# Altium PCB 175-00059, rev1, PCB, Extender for Short Crate PCB.PcbDoc
Units mm, origin at the board's own origin, x right, y up, seen from the top; angles counter-clockwise.
Board outline 55.6 x 100 mm, 4 copper layers (Top Layer (*GTL), InternalPlane1(*.GP1), InternalPlane2(*.GP2), Bottom Layer (GBL)); 5 components, 14 nets, 94 pads, 0 vias.
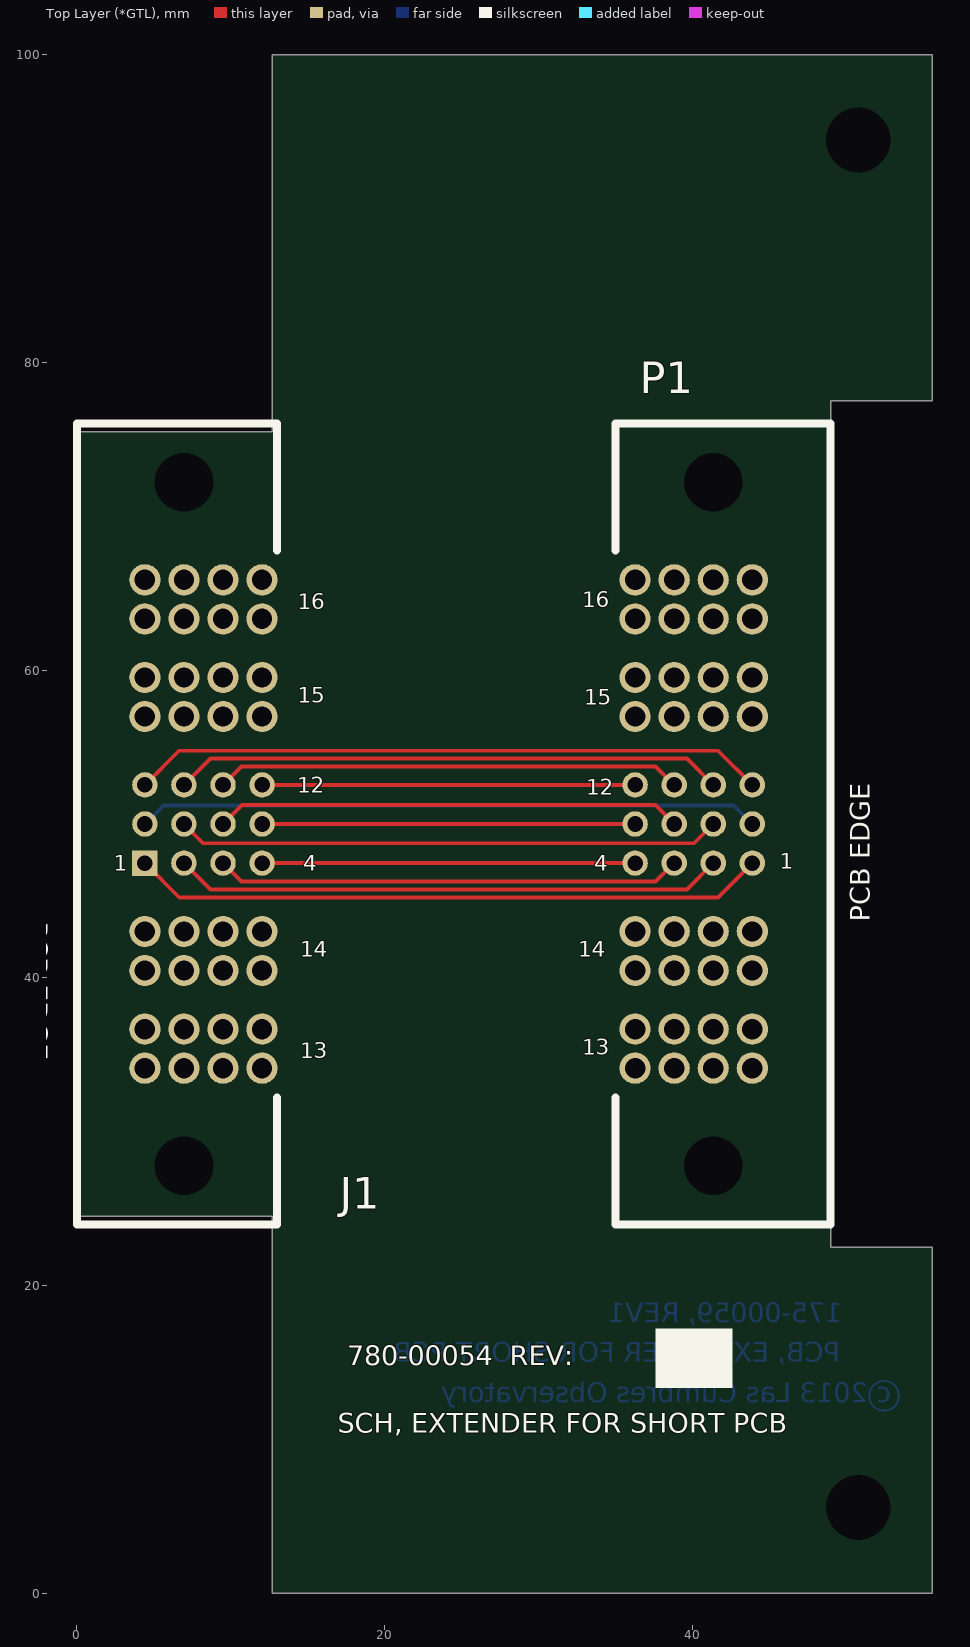
[diagram p0: Top Layer (*GTL) view]
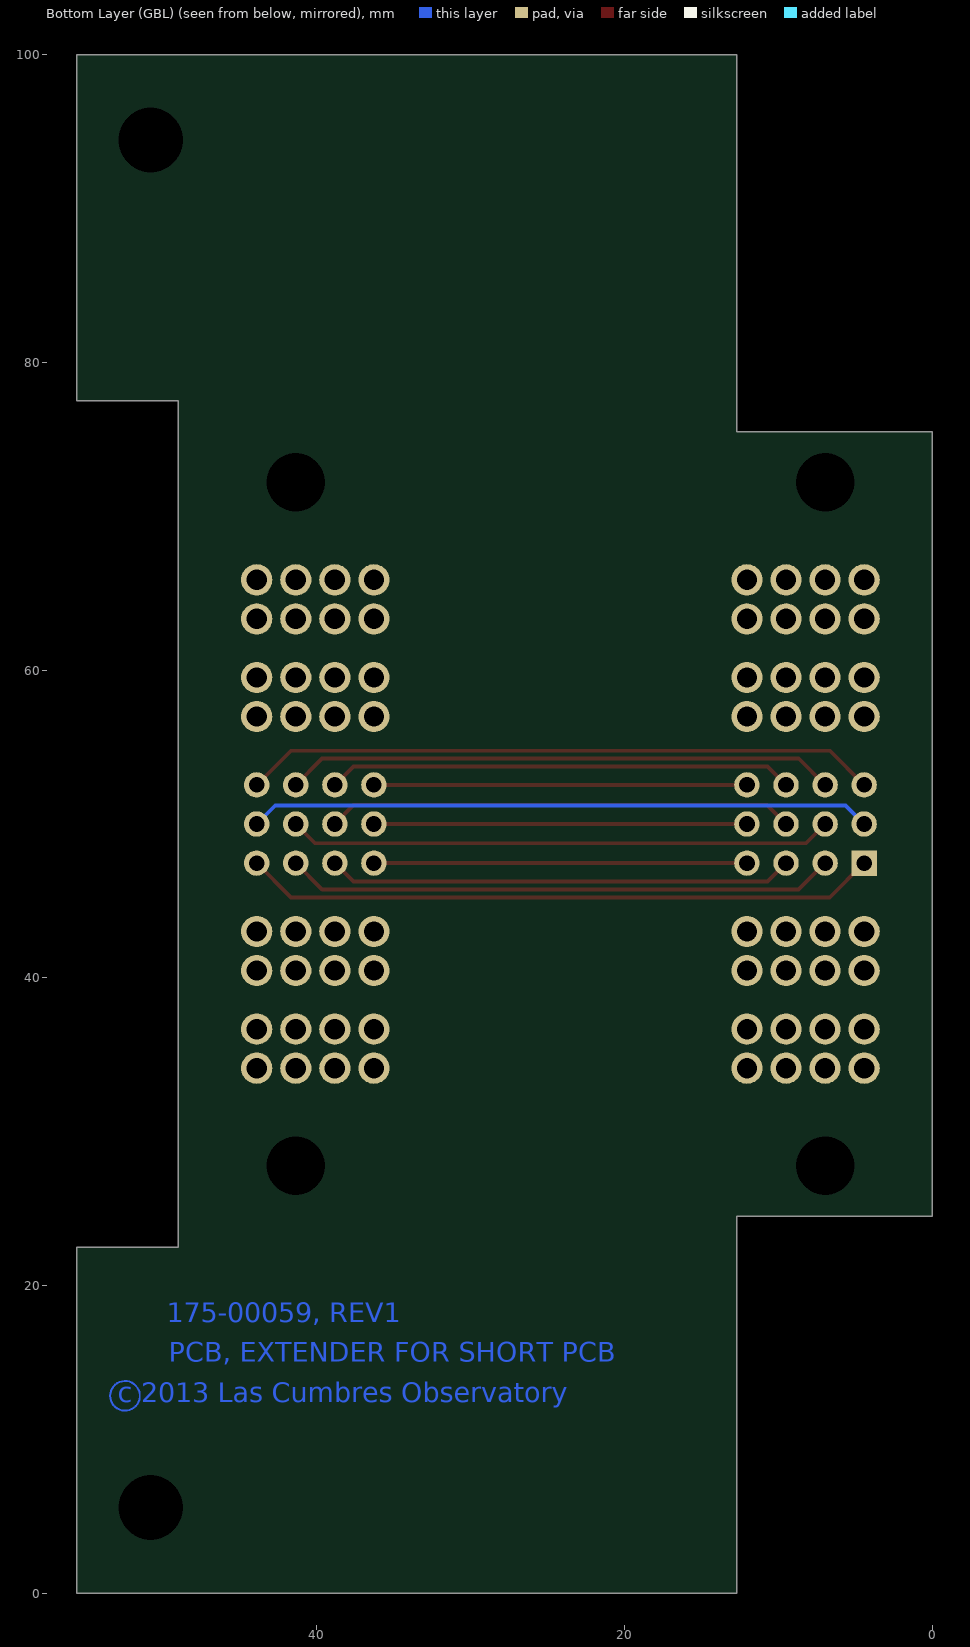
[diagram p1: Bottom Layer (GBL) view, seen from below]
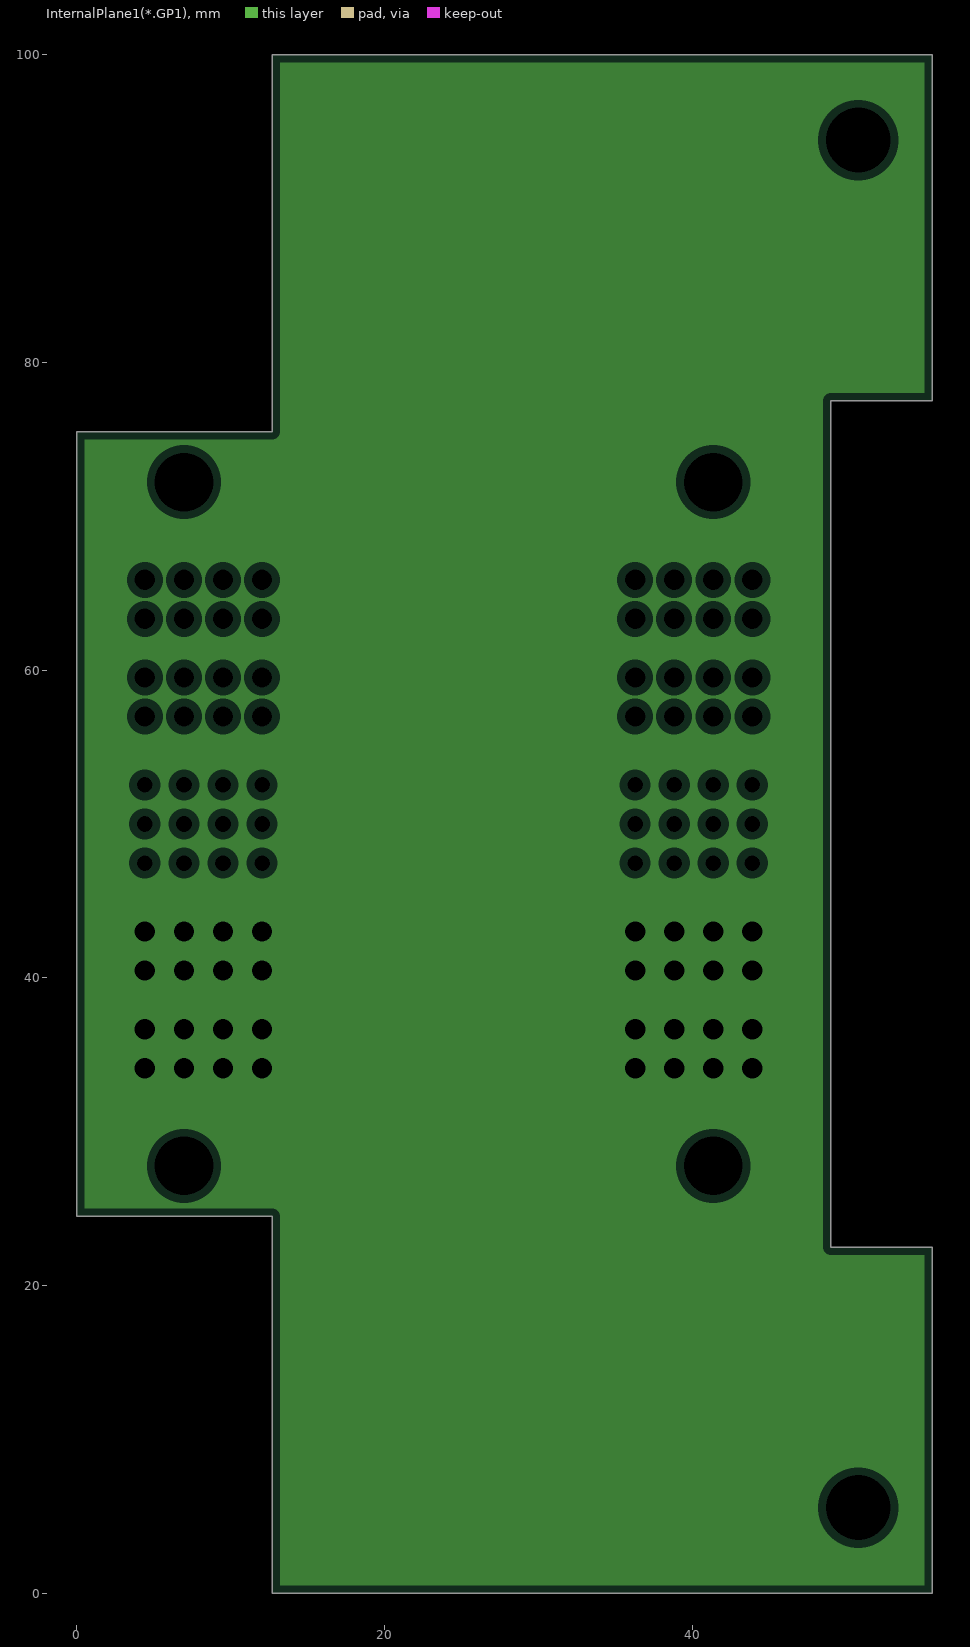
[diagram p2: InternalPlane1(*.GP1), clearances drawn from the general rule]
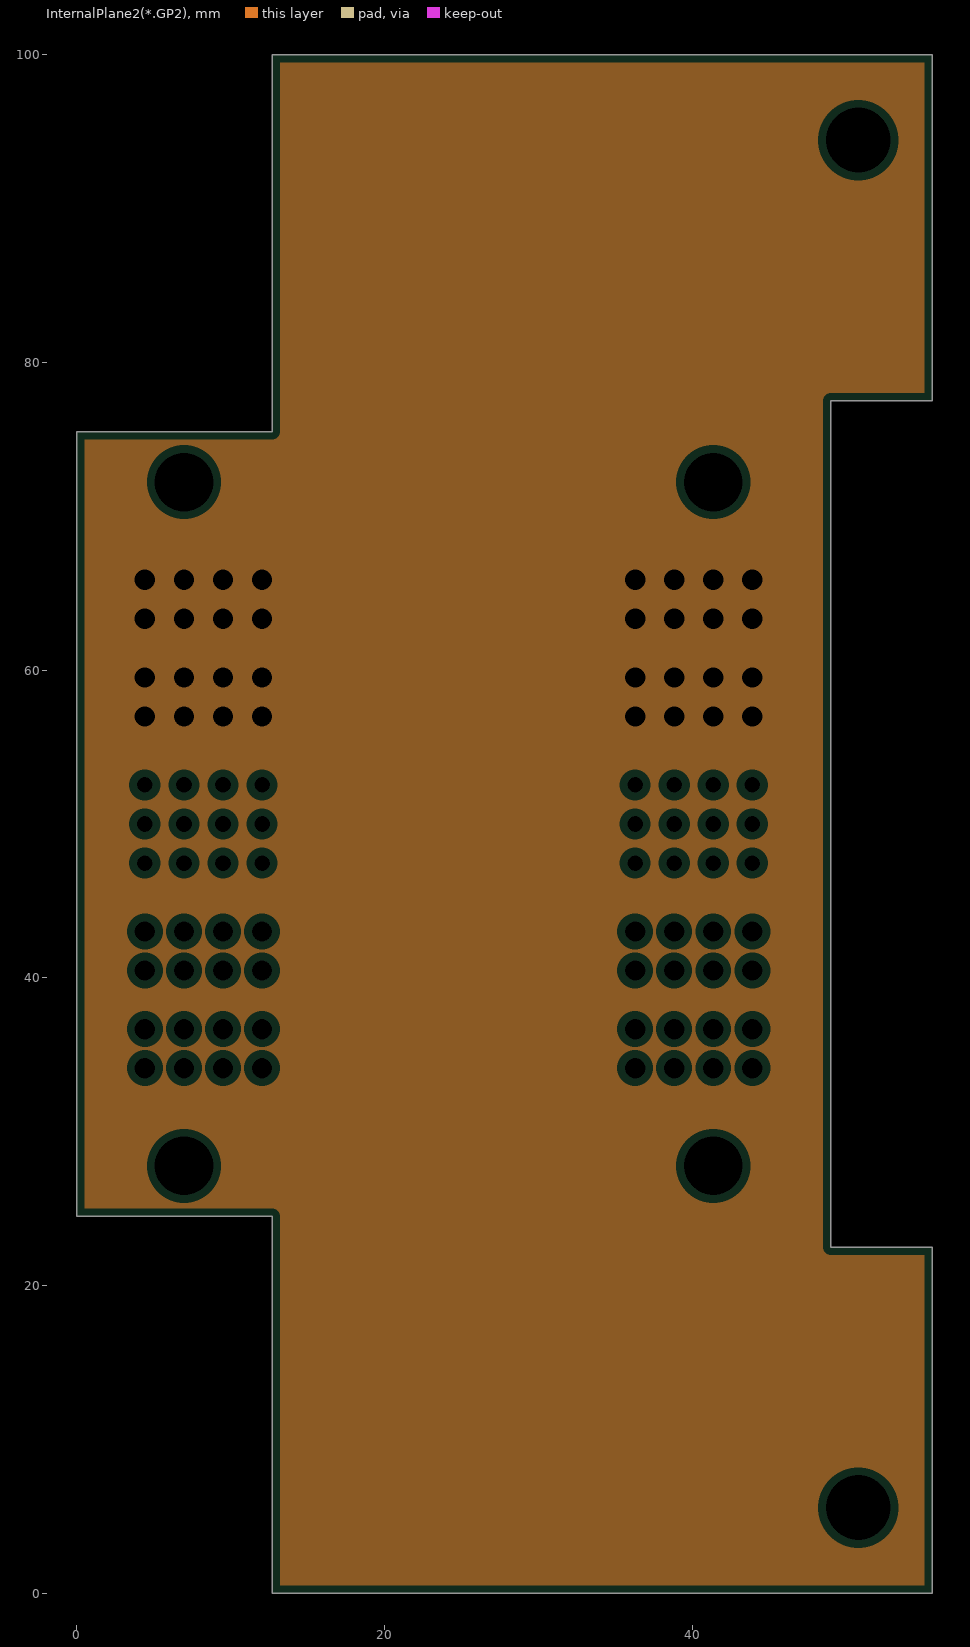
[diagram p3: InternalPlane2(*.GP2), clearances drawn from the general rule]

## Layer stack, top to bottom
Top Layer (*GTL): signal copper 0.0356
Dielectric: core 0.32, FR-4, Dk 4.8
InternalPlane1(*.GP1): plane copper 0.0356, net +24V
Dielectric: prepreg 0.32, FR-4, Dk 4.8
InternalPlane2(*.GP2): plane copper 0.0356, net GND
Dielectric: core 0.32, FR-4, Dk 4.8
Bottom Layer (GBL): signal copper 0.0356

## Board outline
0,24.5 12.7,24.5 12.7,0 55.6,0 55.6,22.5 49,22.5 49,77.5 55.6,77.5 55.6,100 12.7,100 12.7,75.5 0,75.5

## Design rules (kind name [scope] priority, off if disabled: settings)
Clearance [All] p1: gap=0.254
HoleSize [All] p1: absolutevalues=TRUE maxlimit=7.62 minlimit=0.025 maxpercent=80.000 minpercent=20.000
PlaneClearance [All] p1: clearance=0.508
PlaneConnect [All] p1: planeconnectstyle=Direct reliefexpansion=0.508 reliefentries=4 reliefconductorwidth=0.254 reliefairgap=0.254
PolygonConnect [All] p1: connectstyle=Relief reliefconductorwidth=0.254 reliefentries=4 polygonreliefangle="90 Angle"
RoomDefinition "780-00054, rev1, Pg1, SCH, Extender for Short Crate PCB" [InComponentClass('780-00054, rev1, Pg1, SCH, Extender for Short Crate PCB')] p1: confinementstyle=ConfineIn formatcopy=TRUE lockcomponents=FALSE outline -141.075,-15.1 99.125,-15.1 99.125,116.875 -141.075,116.875
RoutingVias [All] p1: holewidth=0.711 width=1.27 viastyle="Through Hole" minholewidth=0.711 minwidth=1.27 maxholewidth=0.711 maxwidth=1.27
SilkscreenOverComponentPads [All] p1: minsilkscreentomaskgap=0.254
SolderMaskExpansion [All] p1: expansion=0.102
Width [All] p1: maxlimit=2.54 minlimit=0.127 preferedwidth=0.254
24 further rules are at their usual default settings.

## Classes and differential pairs
component class "780-00054, rev1, Pg1, SCH, Extender for Short Crate PCB": J1 P1

## Components (designator, comment, footprint, x,y, rotation, side; value= is the part's Value field where it differs from the comment)
Designator89 "Comment" "TARGET MECHANICAL 5" -14.475,-35.7 r0 top
Designator90 "Comment" "TARGET MECHANICAL 5" -24.475,120 r0 top
Designator91 "Comment" "TARGET MECHANICAL 5" 64.425,120.85 r0 top
J1 "PESC-02-12-02--01-S-RA-SD" PESC-02-12-02-01-RA 8.23,50 r0 top
P1 "PETC-02-12-02--01-S-RA-SD" PETC-02-12-02-01-RA 40.1,50 r0 top

## Footprints (in the part's own frame and the unit in brackets; to place one, negate y for a bottom-side part, rotate by r counter-clockwise, add the part's x,y. Pads: shape width x height; smd on the part's side, far side on the other; paste and mask are expansions set on the pad)
PESC-02-12-02-01-RA [mil] "Samtec Female Sockets, PWR(4), Signal(12), Right Angle"
  round 59.06 hole 150 unplated: 0(-50,-875) 0(-50,875)
  rect 65x65 hole 40: 1(-150,-100)
  round 65 hole 40: 2(-50,-100) 3(50,-100) 4(150,-100) 5(-150,0) 6(-50,0) 7(50,0) 8(150,0) 9(-150,100) 10(-50,100) 11(50,100) 12(150,100)
  round 80 hole 52: 13(-150,-625) 13(-150,-525) 13(-50,-625) 13(-50,-525) 13(50,-625) 13(50,-525) 13(150,-625) 13(150,-525) 14(-150,-375) 14(-150,-275) 14(-50,-375) 14(-50,-275) 14(50,-375) 14(50,-275) 14(150,-375) 14(150,-275) 15(-150,275) 15(-150,375) 15(-50,275) 15(-50,375) 15(50,275) 15(50,375) 15(150,275) 15(150,375) 16(-150,525) 16(-150,625) 16(-50,525) 16(-50,625) 16(50,525) 16(50,625) 16(150,525) 16(150,625)
  silkscreen extent -324,-1025 188,1025
PETC-02-12-02-01-RA [mil] "Samtec Male Pins, PWR(4), Signal(12), Right Angle"
  round 59.06 hole 150 unplated: 0(50,-875) 0(50,875)
  round 65 hole 40: 1(150,-100) 2(50,-100) 3(-50,-100) 4(-150,-100) 5(150,0) 6(50,0) 7(-50,0) 8(-150,0) 9(150,100) 10(50,100) 11(-50,100) 12(-150,100)
  round 80 hole 52: 13(-150,-625) 13(-150,-525) 13(-50,-625) 13(-50,-525) 13(50,-625) 13(50,-525) 13(150,-625) 13(150,-525) 14(-150,-375) 14(-150,-275) 14(-50,-375) 14(-50,-275) 14(50,-375) 14(50,-275) 14(150,-375) 14(150,-275) 15(-150,275) 15(-150,375) 15(-50,275) 15(-50,375) 15(50,275) 15(50,375) 15(150,275) 15(150,375) 16(-150,525) 16(-150,625) 16(-50,525) 16(-50,625) 16(50,525) 16(50,625) 16(150,525) 16(150,625)
  silkscreen extent -200,-1025 350,1025
"TARGET MECHANICAL 5" [mm]

## Part data
J1: library part PETC-02-12-02--01-S-RA-SD, "SAMTEC, SIGNAL(12)+PWR(4)"
P1: "SAMTEC, SIGNAL(12)+PWR(4)"

## Free pads (board coordinates)
  round 4 hole 4.22 unplated: 2(50.795,5.563) 2(50.795,94.463)

## Nets (pads, with @x,y where several pads share a name; then routed paths per layer and width w, separated by ;. In a path a pad name is that pad's centre, name@x,y a point inside that pad or via, vN(x,y) a via of type N, cw(c..) or ccw(c..) an arc to the next point about the centre after c; other vN are vias at no path point)
+24V: J1.13 J1.14 P1.13 P1.14
GND: J1.15 J1.16 P1.15 P1.16
NetJ1_1: J1.1 P1.1 | length 41.3
  Top Layer (*GTL) w0.254: J1.1 6.655,45.225 41.675,45.225 P1.1
NetJ1_2: J1.2 P1.2 | length 35.8
  Top Layer (*GTL) w0.254: J1.2 8.678,45.742 39.652,45.742 P1.2
NetJ1_3: J1.3 P1.3 | length 30.3
  Top Layer (*GTL) w0.254: J1.3 10.71,46.25 37.62,46.25 P1.3
NetJ1_4: J1.4 P1.4 | length 24.2
  Top Layer (*GTL) w0.254: J1.4 P1.4
NetJ1_5: J1.5 P1.5 | length 40.5
  Bottom Layer (GBL) w0.254: J1.5 5.626,51.206 7.46,51.206 7.466,51.2 8.994,51.2 9,51.206 42.703,51.206 P1.5
NetJ1_6: J1.6 P1.6 | length 35.4
  Top Layer (*GTL) w0.254: J1.6 8.21,48.75 40.12,48.75 P1.6
NetJ1_7: J1.7 P1.7 | length 30.3
  Top Layer (*GTL) w0.254: J1.7 10.725,51.225 37.605,51.225 P1.7
NetJ1_8: J1.8 P1.8 | length 24.2
  Top Layer (*GTL) w0.254: J1.8 P1.8
NetJ1_9: J1.9 P1.9 | length 41.3
  Top Layer (*GTL) w0.254: J1.9 6.642,54.762 41.687,54.762 P1.9
NetJ1_10: J1.10 P1.10 | length 35.8
  Top Layer (*GTL) w0.254: J1.10 8.674,54.254 39.655,54.254 P1.10
NetJ1_11: J1.11 P1.11 | length 30.3
  Top Layer (*GTL) w0.254: J1.11 10.706,53.746 37.623,53.746 P1.11
NetJ1_12: J1.12 P1.12 | length 24.2
  Top Layer (*GTL) w0.254: J1.12 P1.12
pads on no net: J1.0 P1.0
copper on no net: | length 6.1
  Bottom Layer (GBL) w0.127: 53.44,12.825 ccw(c52.475,12.825) 53.44,12.825

## Polygon pours and split planes (outlines as drawn)
+24V on InternalPlane1(*.GP1) (split plane): 55.09,78.01 49,78.01 48.9,78.001 48.805,77.972 48.716,77.924 48.639,77.861 48.576,77.784 48.528,77.695 48.499,77.6 48.49,77.5 48.49,22.5 48.499,22.4 48.528,22.305 48.576,22.216 48.639,22.139 48.716,22.076 48.805,22.028 48.9,21.999 49,21.99 55.09,21.99 55.09,0.51 13.21,0.51 13.21,24.5 13.201,24.6 13.172,24.695 13.124,24.784 13.061,24.861 12.984,24.924 12.895,24.972 12.8,25.001 12.7,25.01 0.51,25.01 0.51,74.99 12.7,74.99 12.8,74.999 12.895,75.028 12.984,75.076 13.061,75.139 13.124,75.216 13.172,75.305 13.201,75.4 13.21,75.5 13.21,99.49 55.09,99.49
GND on InternalPlane2(*.GP2) (split plane): 55.09,78.01 49,78.01 48.9,78.001 48.805,77.972 48.716,77.924 48.639,77.861 48.576,77.784 48.528,77.695 48.499,77.6 48.49,77.5 48.49,22.5 48.499,22.4 48.528,22.305 48.576,22.216 48.639,22.139 48.716,22.076 48.805,22.028 48.9,21.999 49,21.99 55.09,21.99 55.09,0.51 13.21,0.51 13.21,24.5 13.201,24.6 13.172,24.695 13.124,24.784 13.061,24.861 12.984,24.924 12.895,24.972 12.8,25.001 12.7,25.01 0.51,25.01 0.51,74.99 12.7,74.99 12.8,74.999 12.895,75.028 12.984,75.076 13.061,75.139 13.124,75.216 13.172,75.305 13.201,75.4 13.21,75.5 13.21,99.49 55.09,99.49

## Other copper
Top Layer (*GTL):
  text "*.GTL - TOP LAYER GERBER DATA" at -7.032,-27.325 h2.03
Bottom Layer (GBL):
  text "175-00059, REV1" at 49.75,17.625 h1.27
  text "PCB, EXTENDER FOR SHORT PCB" at 49.625,15.025 h1.27
  text "c 2013 Las Cumbres Observatory" at 52.95,12.4 h1.27
  text "*.GBL - BOTTOM LAYER GERBER DATA" at -7.032,-27.325 h2.03
InternalPlane1(*.GP1) (plane layer: these items are gaps in the copper):
  text "*.GP1 - INTERNAL PLANE LAYER 1 GERBER DATA" at -7.032,-27.325 h2.03
InternalPlane2(*.GP2) (plane layer: these items are gaps in the copper):
  text "*.GP2 - INTERNAL PLANE LAYER 2 GERBER DATA" at -7.032,-27.325 h2.03

## Silkscreen, mask and mechanical layers (free items; w line width, h text height)
Top Overlay:
  rectangle: 37.6,13.35 42.625,17.2
  text "780-00054  REV:" at 17.575,14.8 h1.27
  text "SCH, EXTENDER FOR SHORT PCB" at 16.95,10.425 h1.27
  text "*.GTO - TOP OVERLAY GERBER DATA" at -7.032,-27.325 h2.03
Top Solder:
  text "*.GTS - TOP SOLDER MASK GERBER DATA" at -7.032,-27.325 h2.03
Bottom Solder:
  rectangle: 13.775,11.3 53.575,19.875
  text "*.GBS - BOTTOM SOLDER MASK GERBER DATA" at -7.032,-27.325 h2.03
Mechanical 1:
  the board outline again, w1
Mechanical 2:
  lines w0.127: -0.425,0 10.925,0 ; 0,-0.325 0,22.825
  lines w0.254: -390.507,-183.007 -390.507,223.393 142.893,223.393 142.893,-183.007 -390.507,-183.007 ; 39.896,-180.315 ccw(c41.166,-180.315) 41.166,-181.585 49.548,-181.585 ccw(c49.548,-180.569) 50.564,-180.569 50.564,-176.251 ccw(c49.548,-176.251) 49.548,-175.235 39.896,-175.235 39.896,-180.315 ; 39.896,-172.949 ccw(c41.166,-172.949) 41.166,-174.219 140.226,-174.219 ccw(c140.226,-172.949) 141.496,-172.949 141.496,-168.123 ccw(c140.226,-168.123) 140.226,-166.853 39.896,-166.853 39.896,-172.949 ; 39.896,-164.567 ccw(c41.166,-164.567) 41.166,-165.837 88.918,-165.837 ccw(c88.918,-164.567) 90.188,-164.567 90.188,-160.757 ccw(c88.918,-160.757) 88.918,-159.487 39.896,-159.487 39.896,-164.567 ; 39.896,-157.455 ccw(c40.912,-157.455) 40.912,-158.471 61.486,-158.471 ccw(c61.486,-157.201) 62.756,-157.201 62.756,-153.391 ccw(c61.486,-153.391) 61.486,-152.121 39.896,-152.121 39.896,-157.455 ; 51.58,-180.569 ccw(c52.596,-180.569) 52.596,-181.585 102.38,-181.585 ccw(c102.38,-180.569) 103.396,-180.569 103.396,-176.251 ccw(c102.38,-176.251) 102.38,-175.235 51.58,-175.235 51.58,-180.569 ; 63.772,-157.201 ccw(c65.042,-157.201) 65.042,-158.471 88.918,-158.471 ccw(c88.918,-157.201) 90.188,-157.201 90.188,-153.391 ccw(c88.918,-153.391) 88.918,-152.121 63.772,-152.121 63.772,-157.201 ; 91.204,-164.567 ccw(c92.474,-164.567) 92.474,-165.837 140.226,-165.837 ccw(c140.226,-164.567) 141.496,-164.567 141.496,-160.757 ccw(c140.226,-160.757) 140.226,-159.487 91.204,-159.487 91.204,-164.567 ; 91.204,-157.201 ccw(c92.474,-157.201) 92.474,-158.471 116.35,-158.471 ccw(c116.35,-157.201) 117.62,-157.201 117.62,-153.391 ccw(c116.35,-153.391) 116.35,-152.121 91.204,-152.121 91.204,-157.201 ; 104.412,-180.315 ccw(c105.682,-180.315) 105.682,-181.585 114.064,-181.585 ccw(c114.064,-180.569) 115.08,-180.569 115.08,-176.251 ccw(c114.064,-176.251) 114.064,-175.235 104.412,-175.235 104.412,-180.315 ; 116.096,-180.569 ccw(c117.112,-180.569) 117.112,-181.585 140.226,-181.585 ccw(c140.226,-180.315) 141.496,-180.315 141.496,-176.505 ccw(c140.226,-176.505) 140.226,-175.235 116.096,-175.235 116.096,-180.569 ; 118.636,-157.201 ccw(c119.906,-157.201) 119.906,-158.471 140.226,-158.471 ccw(c140.226,-157.201) 141.496,-157.201 141.496,-153.391 ccw(c140.226,-153.391) 140.226,-152.121 118.636,-152.121 118.636,-157.201
  lines w0.356: -358.576,-84.364 -226.374,-84.364 ; -358.576,-77.656 -226.374,-77.656 ; -360.1,-138.316 ccw(c-357.941,-138.316) -357.941,-140.475 -227.009,-140.475 ccw(c-227.009,-138.316) -224.85,-138.316 -224.85,-58.734 ccw(c-227.009,-58.734) -227.009,-56.575 -357.941,-56.575 ccw(c-357.941,-58.734) -360.1,-58.734 -360.1,-138.316
  lines w0.508: -389.997,-166.602 cw(c-388.729,-168.504) -388.729,-166.218 ; -388.729,-167.234 ccw(c-388.729,-168.504) -389.999,-168.504 -389.999,-180.95 ccw(c-388.729,-180.95) -388.729,-182.22 -307.449,-182.22 ccw(c-307.449,-180.95) -306.179,-180.95 -306.179,-172.314 ccw(c-307.449,-172.314) -307.449,-171.044 -374.505,-171.044 ; -305.547,-182.218 ccw(c-307.449,-180.95) -305.163,-180.95 -305.163,-172.314 ; 38.783,-182.6 cw(c41.166,-180.315) 37.864,-180.315 37.864,-137.897 cw(c41.166,-137.897) 41.166,-134.595 140.226,-134.595 cw(c140.226,-137.897) 142.478,-135.482 ; -199.245,-178.435 ccw(c-195.943,-178.435) -195.943,-181.737 -75.547,-181.737 ccw(c-75.547,-178.435) -72.245,-178.435 -72.245,-138.049 ccw(c-75.547,-138.049) -75.547,-134.747 -195.943,-134.747 ccw(c-195.943,-138.049) -199.245,-138.049 -199.245,-178.435 ; 38.88,-180.315 ccw(c41.166,-180.315) 41.166,-182.601 140.226,-182.601 ccw(c140.226,-180.315) 142.512,-180.315 142.512,-137.897 ccw(c140.226,-137.897) 140.226,-135.611 41.166,-135.611 ccw(c41.166,-137.897) 38.88,-137.897 38.88,-180.315
  lines w0.61: -134.475,-177.673 -130.665,-177.673 ; -134.475,-171.323 -130.665,-171.323 ; -134.475,-164.973 -130.665,-164.973 ; -134.475,-158.623 -130.665,-158.623 ; -134.475,-152.273 -130.665,-152.273
  lines w0.762: -403.207,-195.707 -403.207,236.093 155.593,236.093 155.593,-195.707 -403.207,-195.707
  lines w1.27: 43.579,-148.336 85.489,-148.336 ; 43.579,-138.684 85.489,-138.684 ; 85.489,-148.336 85.489,-138.684 ; 85.489,-148.336 43.325,-148.336 43.325,-138.684 85.489,-138.684
  text "NOTES (UNLESS OTHERWISE SPECIFIED):" at -382.379,210.083 h2.29
  text "GENERAL" at -379.839,205.003 h2.29
  text "1)" at -377.299,199.922 h1.91
  text "PCB IS 4-LAYER, .062\" THICK." at -372.219,199.923 h1.91
  text "2)" at -377.299,196.112 h1.91
  text "CONSTRUCTION IS SOLDER-MASK-OVER-BARE-COPPER (SMOBC)." at -372.219,196.112 h1.91
  text "3)" at -377.299,192.302 h1.91
  text "ACCEPTABILITY SHALL BE BASED ON IPC-A-600, CLASS 2." at -372.219,192.302 h1.91
  text "4)" at -377.299,188.492 h1.91
  text "THE FOLLOWING GERBER RS274X PHOTO TOOL FILES SHALL BE USED TO DEFINE ALL CIRCUIT FEATURES:" at -372.219,188.492 h1.91
  text "*.GTL - TOP LAYER GERBER DATA" at -365.259,183.134 h2.03
  text "*.GP1 - INTERNAL PLANE LAYER 1 GERBER DATA" at -365.259,167.522 h2.03
  text "*.GP2 - INTERNAL PLANE LAYER 2 GERBER DATA" at -365.259,163.618 h2.03
  text "*.GBL - BOTTOM LAYER GERBER DATA" at -365.259,148.006 h2.03
  text "*.GTO - TOP OVERLAY GERBER DATA" at -365.259,144.103 h2.03
  text "*.GTS - TOP SOLDER MASK GERBER DATA" at -365.259,140.2 h2.03
  text "*.GTP - TOP-SIDE SOLDER PASTE MASK" at -365.259,136.296 h2.03
  text "*.GBS - BOTTOM SOLDER MASK GERBER DATA" at -365.259,128.49 h2.03
  text "5)" at -379.762,106.407 h1.91
  text "THE PHOTO TOOL SHALL NOT BE COMPENSATED WITHOUT PRIOR ENGINEERING APPROVAL." at -374.682,106.407 h1.91
  text "PCB DESIGNER: RICH LOBDILL   PH (805) 880-1621  FAX (805) 961-1792." at -374.682,102.598 h1.91
  text "FABRICATION TOLERANCES" at -378.365,94.31 h2.29
  text "6)" at -375.825,89.229 h1.91
  text "END PRODUCT CONDUCTOR WIDTHS AND PAD DIAMETERS SHALL NOT VARY MORE THAN" at -370.745,89.229 h1.91
  text "0.002\" FROM THE 1:1 DIMENSIONS OF THE MASTER ARTWORK." at -370.745,85.42 h1.91
  text "7)" at -375.825,81.609 h1.91
  text "THE CONDUCTIVE PATTERN SHALL BE POSITIONED SO THAT THE LOCATION OF ANY PAD OR" at -370.745,81.609 h1.91
  text "LAND SHALL BE WITHIN 0.005\" DIAMETER TO THE TRUE POSITION OF THE HOLE IT CIRCUMSCRIBES." at -370.745,77.8 h1.91
  text "8)" at -375.825,73.989 h1.91
  text "ALL DRILL HOLE SIZES AND TOLERANCES APPLY AFTER PLATING." at -370.745,73.989 h1.91
  text "9)" at -375.825,70.179 h1.91
  text "THE MINIMUM ANNULAR RING SHALL BE 0.005\"." at -370.745,70.179 h1.91
  text "10)" at -377.222,66.369 h1.91
  text "BOW AND TWIST SHALL NOT EXCEED 0.010\" PER INCH." at -370.745,66.369 h1.91
  text "11)" at -376.968,62.559 h1.91
  text "FOR PCB ROUTING DIMENSIONS: .XXX = +/-.005\"  .XX = +/-.020\"" at -370.745,62.559 h1.91
  text "MATERIAL" at -378.365,57.48 h2.29
  text "12)" at -377.222,52.399 h1.91
  text "BASE MATERIAL IS FR4 EPOXY FIBERGLASS" at -370.568,52.248 h1.91
  text "SEE STACK-UP LEGEND FOR COPPER CLADDING CALL OUTS" at -370.568,48.692 h1.91
  text "13)" at -377.222,48.589 h1.91
  text "PLATING" at -378.365,43.51 h2.29
  text "14)" at -377.222,38.556 h1.91
  text "ALL HOLES AND CONDUCTIVE SURFACES SHALL BE PLATED WITH A MINIMUM OF 0.001\" COPPER." at -370.745,38.556 h1.91
  text "15)" at -377.222,34.746 h1.91
  text "AFTER SOLDERMASK, ALL EXPOSED HOLES AND CONDUCTIVE SURFACES SHALL BE COATED" at -370.745,34.746 h1.91
  text "WITH A GOLD IMMERSION PLATING TO PRESERVE SOLDERABILITY." at -370.568,30.912 h1.91
  text "16)" at -376.562,26.289 h1.91
  text "COPPER THEVING ON LAYERS AS NEEDED" at -370.491,26.237 h1.91
  text "COATINGS" at -378.365,18.364 h2.29
  text "THE SOLDERMASK SHALL BE RED LIQUID PHOTO-IMAGEABLE PER IPC-SM-840, TYPE-B, CLASS 2." at -370.745,13.41 h1.91
  text "17)" at -376.943,13.335 h1.91
  text "THE SOLDERMASK REGISTRATION ALLOWANCE IS 0.003\".  THERE SHALL BE NO SOLDERMASK ON" at -370.745,9.6 h1.91
  text "18)" at -377.197,8.89 h1.91
  text "ANY SOLDER PAD OR LAND." at -370.745,5.79 h1.91
  text "MARKING" at -378.365,0.711 h2.29
  text "THE LEGEND SHALL BE SCREEN-PRINTED USING PERMANENT YELLOW EPOXY INK." at -370.745,-4.243 h1.91
  text "19)" at -377.324,-4.318 h1.91
  text "THE SCREEN PRINTING REGISTRATION ALLOWANCE IS 0.007\".  THERE SHALL BE NO INK ON ANY" at -370.745,-8.053 h1.91
  text "20)" at -377.324,-8.509 h1.91
  text "SOLDER PAD OR LAND." at -370.745,-11.862 h1.91
  text "21)" at -377.222,-15.292 h1.91
  text "THE VENDOR CODE AND UL FLAMMABILITY RATING MAY BE ETCHED IN THE FOIL OR MARKED IN" at -370.745,-15.673 h1.91
  text "PERMANENT EPOXY INK (VENDOR'S OPTION)." at -370.745,-19.482 h1.91
  text "ELECTRICAL TESTING" at -378.365,-24.562 h2.29
  text "22)" at -377.222,-29.516 h1.91
  text "ALL BOARDS SHALL BE ELECTRICALLY TESTED TO THE SUPPLIED IPC-D-356A NET LIST" at -370.745,-29.516 h1.91
  text "FOR CONTINUITY, OPENS AND SHORTS." at -370.745,-33.325 h1.91
  text "Layer Stack Up Detail for: 175-00059, rev1, PCB, Extender for Short Crate PCB.PcbDoc" at -358.576,-68.177 h1.55
  text "Layer" at -358.576,-80.158 h1.55
  text "COPPER THICKNESS" at -289.35,-82.25 h2.54
  text "Name" at -358.576,-83.256 h1.55
  text "Top Layer (*GTL)" at -358.576,-90.898 h2.16
  text "1/2 oz,  1 oz Finished" at -298.95,-91 h2.54
  text "InternalPlane1(*.GP1)" at -358.576,-103.612 h2.16
  text "1 oz" at -298.125,-103.75 h2.54
  text "1 oz" at -298.125,-115.85 h2.54
  text "InternalPlane2(*.GP2)" at -358.576,-116.325 h2.16
  text "1/2 oz,  1 oz Finished" at -300.625,-129 h2.54
  text "Bottom Layer (GBL)" at -358.576,-129.038 h2.16
  text "Las Cumbres Observatory, Inc." at 89.807,-139.192 h2.29
  text "Las Cumbres Observatory" at 44.849,-142.24 h3.81
  text "PRIMARY PCB SPECIFICATIONS" at -187.891,-142.621 h5.08
  text "6740 Cortona Dr." at 100.983,-143.104 h2.29
  text "Global Telescope Network" at 48.913,-146.304 h3.17
  text "Goleta, CA 93117" at 99.713,-146.914 h2.29
  text "(REFER TO COMPLETE SPEC LISTING AT LEFT FOR FURTHER DETAILS)" at -196.705,-147.828 h2.54
  text "www.lcogt.net" at 103.269,-150.622 h2.29
  text "DATE" at 40.404,-153.436 h0.81
  text "DESIGNED" at 64.28,-153.436 h0.81
  text "DRAWN" at 91.712,-153.436 h0.81
  text "SCALE" at 119.144,-153.436 h0.81
  text "NUMBER OF LAYERS" at -194.165,-154.178 h3.81
  text "4" at -103.995,-154.178 h3.81
  text "Rich Lobdill" at 99.459,-155.956 h1.4
  text "Rich Lobdill" at 70.884,-156.083 h1.4
  text "1 : 1" at 126.383,-156.439 h2.29
  text "1/3/2012" at 41.166,-156.616 h2.29
  text "FINISHED THICKNESS" at -194.165,-160.528 h3.81
  text ".062\"" at -108.44,-160.528 h3.81
  text "CHECKED/DATE" at 40.404,-160.802 h0.81
  text "APPROVED/DATE" at 91.712,-160.802 h0.81
  text "BASE MATERIAL" at -194.165,-166.878 h3.81
  text "FR4" at -110.345,-166.878 h3.81
  text "TITLE" at 40.404,-168.168 h0.81
  text "175-00059, Extender for Short Crate PCB" at 45.992,-171.831 h2.54
  text "GOLD IMMERSION" at -122.892,-172.39 h3.81
  text "PLATING TYPE" at -194.165,-173.228 h3.81
  text "THIS DRAWING EMBODIES A PROPRIETARY DESIGN OWNED BY LAS CUMBRES" at -387.713,-173.838 h1.52
  text "OBSERVATORY.  IT IS SUBMITTED FOR A SPECIFIC PURPOSE UNDER A CON-" at -387.713,-176.378 h1.52
  text "SIZE" at 40.404,-176.55 h0.81
  text "DOC NO." at 52.088,-176.55 h0.81
  text "REV" at 104.92,-176.55 h0.81
  text "SHEET" at 116.604,-176.55 h0.81
  text "FIDENTIAL RELATIONSHIP, AND EXCEPT FOR PURPOSES EXPRESSLY GRANTED" at -387.713,-178.791 h1.52
  text "OF" at 127.526,-179.172 h1.52
  text "SOLDER MASK COLOR" at -194.165,-179.578 h3.81
  text "RED" at -107.17,-179.578 h3.81
  text "1" at 123.208,-179.68 h2.54
  text "X" at 133.368,-179.68 h2.54
  text "1" at 108.603,-180.01 h3.3
  text "-" at 66.185,-180.061 h3.3
  text "GPT" at 84.466,-180.436 h3.3
  text "C" at 43.833,-180.467 h2.54
  text "IN WRITING, ALL RIGHTS ARE RESERVED BY LAS CUMBRES OBSERVATORY." at -387.713,-181.077 h1.52
Mechanical 5:
  text "175-00059 REV1" at -6.498,-16.388 h2.03
  text "LAS CUMBRES OBSERVATORY     1/3/2013" at -6.498,-20.199 h2.03
Drill Drawing:
  lines w0.254: -390.507,-183.007 -390.507,223.393 142.893,223.393 142.893,-183.007 -390.507,-183.007 ; 39.896,-180.315 ccw(c41.166,-180.315) 41.166,-181.585 49.548,-181.585 ccw(c49.548,-180.569) 50.564,-180.569 50.564,-176.251 ccw(c49.548,-176.251) 49.548,-175.235 39.896,-175.235 39.896,-180.315 ; 39.896,-172.949 ccw(c41.166,-172.949) 41.166,-174.219 140.226,-174.219 ccw(c140.226,-172.949) 141.496,-172.949 141.496,-168.123 ccw(c140.226,-168.123) 140.226,-166.853 39.896,-166.853 39.896,-172.949 ; 39.896,-164.821 ccw(c40.912,-164.821) 40.912,-165.837 76.98,-165.837 ccw(c76.98,-164.567) 78.25,-164.567 78.25,-160.757 ccw(c76.98,-160.757) 76.98,-159.487 39.896,-159.487 39.896,-164.821 ; 51.58,-180.569 ccw(c52.596,-180.569) 52.596,-181.585 102.38,-181.585 ccw(c102.38,-180.569) 103.396,-180.569 103.396,-176.251 ccw(c102.38,-176.251) 102.38,-175.235 51.58,-175.235 51.58,-180.569 ; 79.266,-164.567 ccw(c80.536,-164.567) 80.536,-165.837 116.35,-165.837 ccw(c116.35,-164.567) 117.62,-164.567 117.62,-160.757 ccw(c116.35,-160.757) 116.35,-159.487 79.266,-159.487 79.266,-164.567 ; 104.412,-180.315 ccw(c105.682,-180.315) 105.682,-181.585 114.064,-181.585 ccw(c114.064,-180.569) 115.08,-180.569 115.08,-176.251 ccw(c114.064,-176.251) 114.064,-175.235 104.412,-175.235 104.412,-180.315 ; 116.096,-180.569 ccw(c117.112,-180.569) 117.112,-181.585 140.226,-181.585 ccw(c140.226,-180.315) 141.496,-180.315 141.496,-176.505 ccw(c140.226,-176.505) 140.226,-175.235 116.096,-175.235 116.096,-180.569 ; 118.636,-164.567 ccw(c119.906,-164.567) 119.906,-165.837 140.226,-165.837 ccw(c140.226,-164.567) 141.496,-164.567 141.496,-160.757 ccw(c140.226,-160.757) 140.226,-159.487 118.636,-159.487 118.636,-164.567
  lines w0.508: -389.87,-166.983 cw(c-388.602,-168.885) -388.602,-166.599 ; -388.602,-167.615 ccw(c-388.602,-168.885) -389.872,-168.885 -389.872,-181.331 ccw(c-388.602,-181.331) -388.602,-182.601 -307.322,-182.601 ccw(c-307.322,-181.331) -306.052,-181.331 -306.052,-172.695 ccw(c-307.322,-172.695) -307.322,-171.425 -374.378,-171.425 ; -305.42,-182.599 ccw(c-307.322,-181.331) -305.036,-181.331 -305.036,-172.695 ; 38.751,-182.567 cw(c41.166,-180.315) 37.864,-180.315 37.864,-159.487 cw(c39.896,-159.487) 39.896,-157.455 140.226,-157.455 cw(c140.226,-160.757) 142.478,-158.342 ; 38.88,-180.315 ccw(c41.166,-180.315) 41.166,-182.601 140.226,-182.601 ccw(c140.226,-180.315) 142.512,-180.315 142.512,-160.757 ccw(c140.226,-160.757) 140.226,-158.471 39.896,-158.471 ccw(c39.896,-159.487) 38.88,-159.487 38.88,-180.315
  lines w0.762: -403.207,-195.707 -403.207,236.093 155.593,236.093 155.593,-195.707 -403.207,-195.707
  text ".Legend" at -124.467,-78.435 h2.54
  text "DESIGNED" at 40.404,-160.802 h0.81
  text "DRAWN" at 79.774,-160.802 h0.81
  text "SCALE" at 119.144,-160.802 h0.81
  text "Rich Lobdill" at 52.749,-163.246 h1.4
  text "Rich Lobdill" at 92.398,-163.297 h1.4
  text "1 : 1" at 126.383,-163.805 h2.29
  text "TITLE" at 40.404,-168.168 h0.81
  text "175-00059, Extender for Short Crate PCB" at 45.916,-171.831 h2.54
  text "THIS DRAWING EMBODIES A PROPRIETARY DESIGN OWNED BY LAS CUMBRES" at -387.586,-174.219 h1.52
  text "SIZE" at 40.404,-176.55 h0.81
  text "DOC NO." at 52.088,-176.55 h0.81
  text "REV" at 104.92,-176.55 h0.81
  text "SHEET" at 116.604,-176.55 h0.81
  text "OBSERVATORY.  IT IS SUBMITTED FOR A SPECIFIC PURPOSE UNDER A CON-" at -387.586,-176.759 h1.52
  text "FIDENTIAL RELATIONSHIP, AND EXCEPT FOR PURPOSES EXPRESSLY GRANTED" at -387.586,-179.172 h1.52
  text "OF" at 127.526,-179.172 h1.52
  text "2" at 122.827,-179.68 h2.54
  text "X" at 133.368,-179.68 h2.54
  text "-" at 66.185,-180.061 h3.3
  text "1" at 108.476,-180.061 h3.3
  text "C" at 43.833,-180.467 h3.05
  text "GD1" at 87.013,-180.467 h3.05
  text "IN WRITING, ALL RIGHTS ARE RESERVED BY LAS CUMBRES OBSERVATORY." at -387.586,-181.458 h1.52

## Dimensions
12.7,0 to 12.7,100 on Mechanical 2
0,75.5 to 55.6,100 on Mechanical 2

## Text inside footprints (layer, text, board x,y; h text height)
J1: Top Overlay "15" at 14.351,57.874 h1.02; Top Overlay "14" at 14.529,41.364 h1.02; Top Overlay "12" at 14.326,52.032 h1.02; Top Overlay "4" at 14.707,46.952 h1.02; Top Overlay "16" at 14.351,63.97 h1.02; Top Overlay "13" at 14.529,34.76 h1.02; Top Overlay "1" at 2.388,46.952 h1.02; Top Overlay "PCB EDGE" at -3.2,43.65 h1.27 r270
P1: Top Overlay "1" at 45.688,47.079 h1.02; Top Overlay "PCB EDGE" at 51.53,43.65 h1.27 r90; Top Overlay "13" at 32.861,35.014 h1.02; Top Overlay "16" at 32.861,64.097 h1.02; Top Overlay "4" at 33.623,46.952 h1.02; Top Overlay "12" at 33.115,51.905 h1.02; Top Overlay "14" at 32.607,41.364 h1.02; Top Overlay "15" at 32.988,57.747 h1.02